# Altium PCB fff.PcbDoc
Units mm, origin at the board's own origin, x right, y up, seen from the top; angles counter-clockwise.
Board outline 150 x 100 mm, 2 copper layers (Top Layer, Bottom Layer); 180 components, 16 nets, 505 pads, 526 vias.
Unrouted connection lines stored in the file: 15.
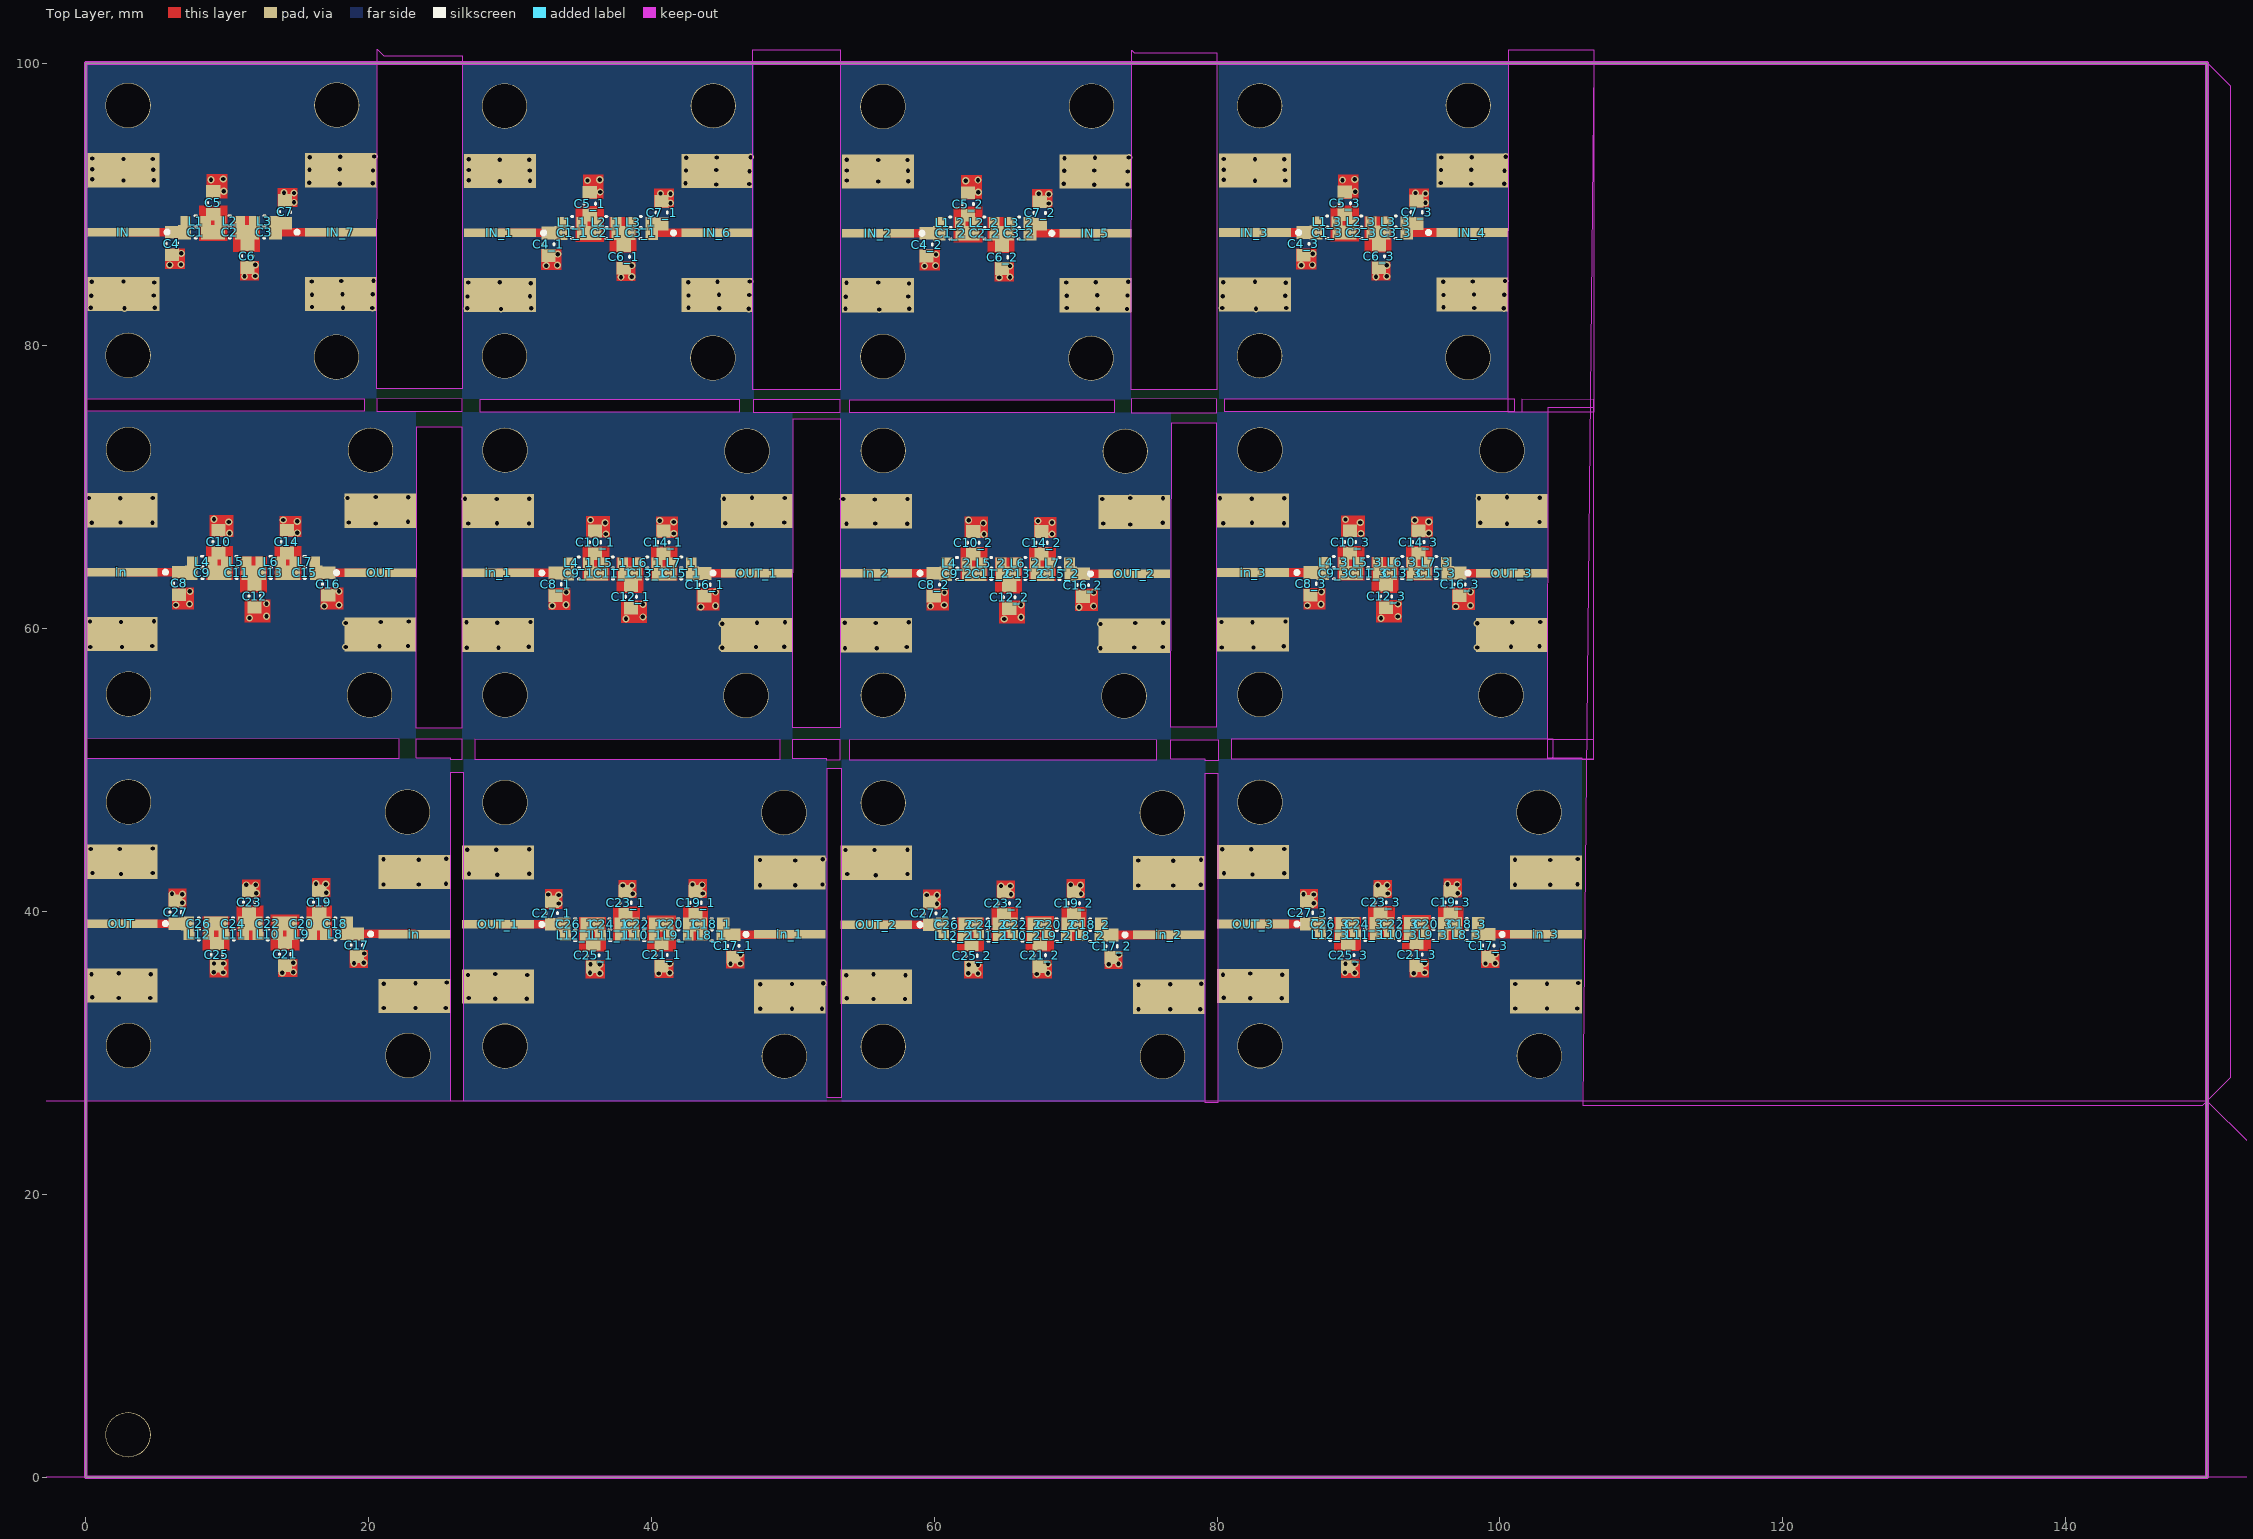
[diagram p0: Top Layer view]
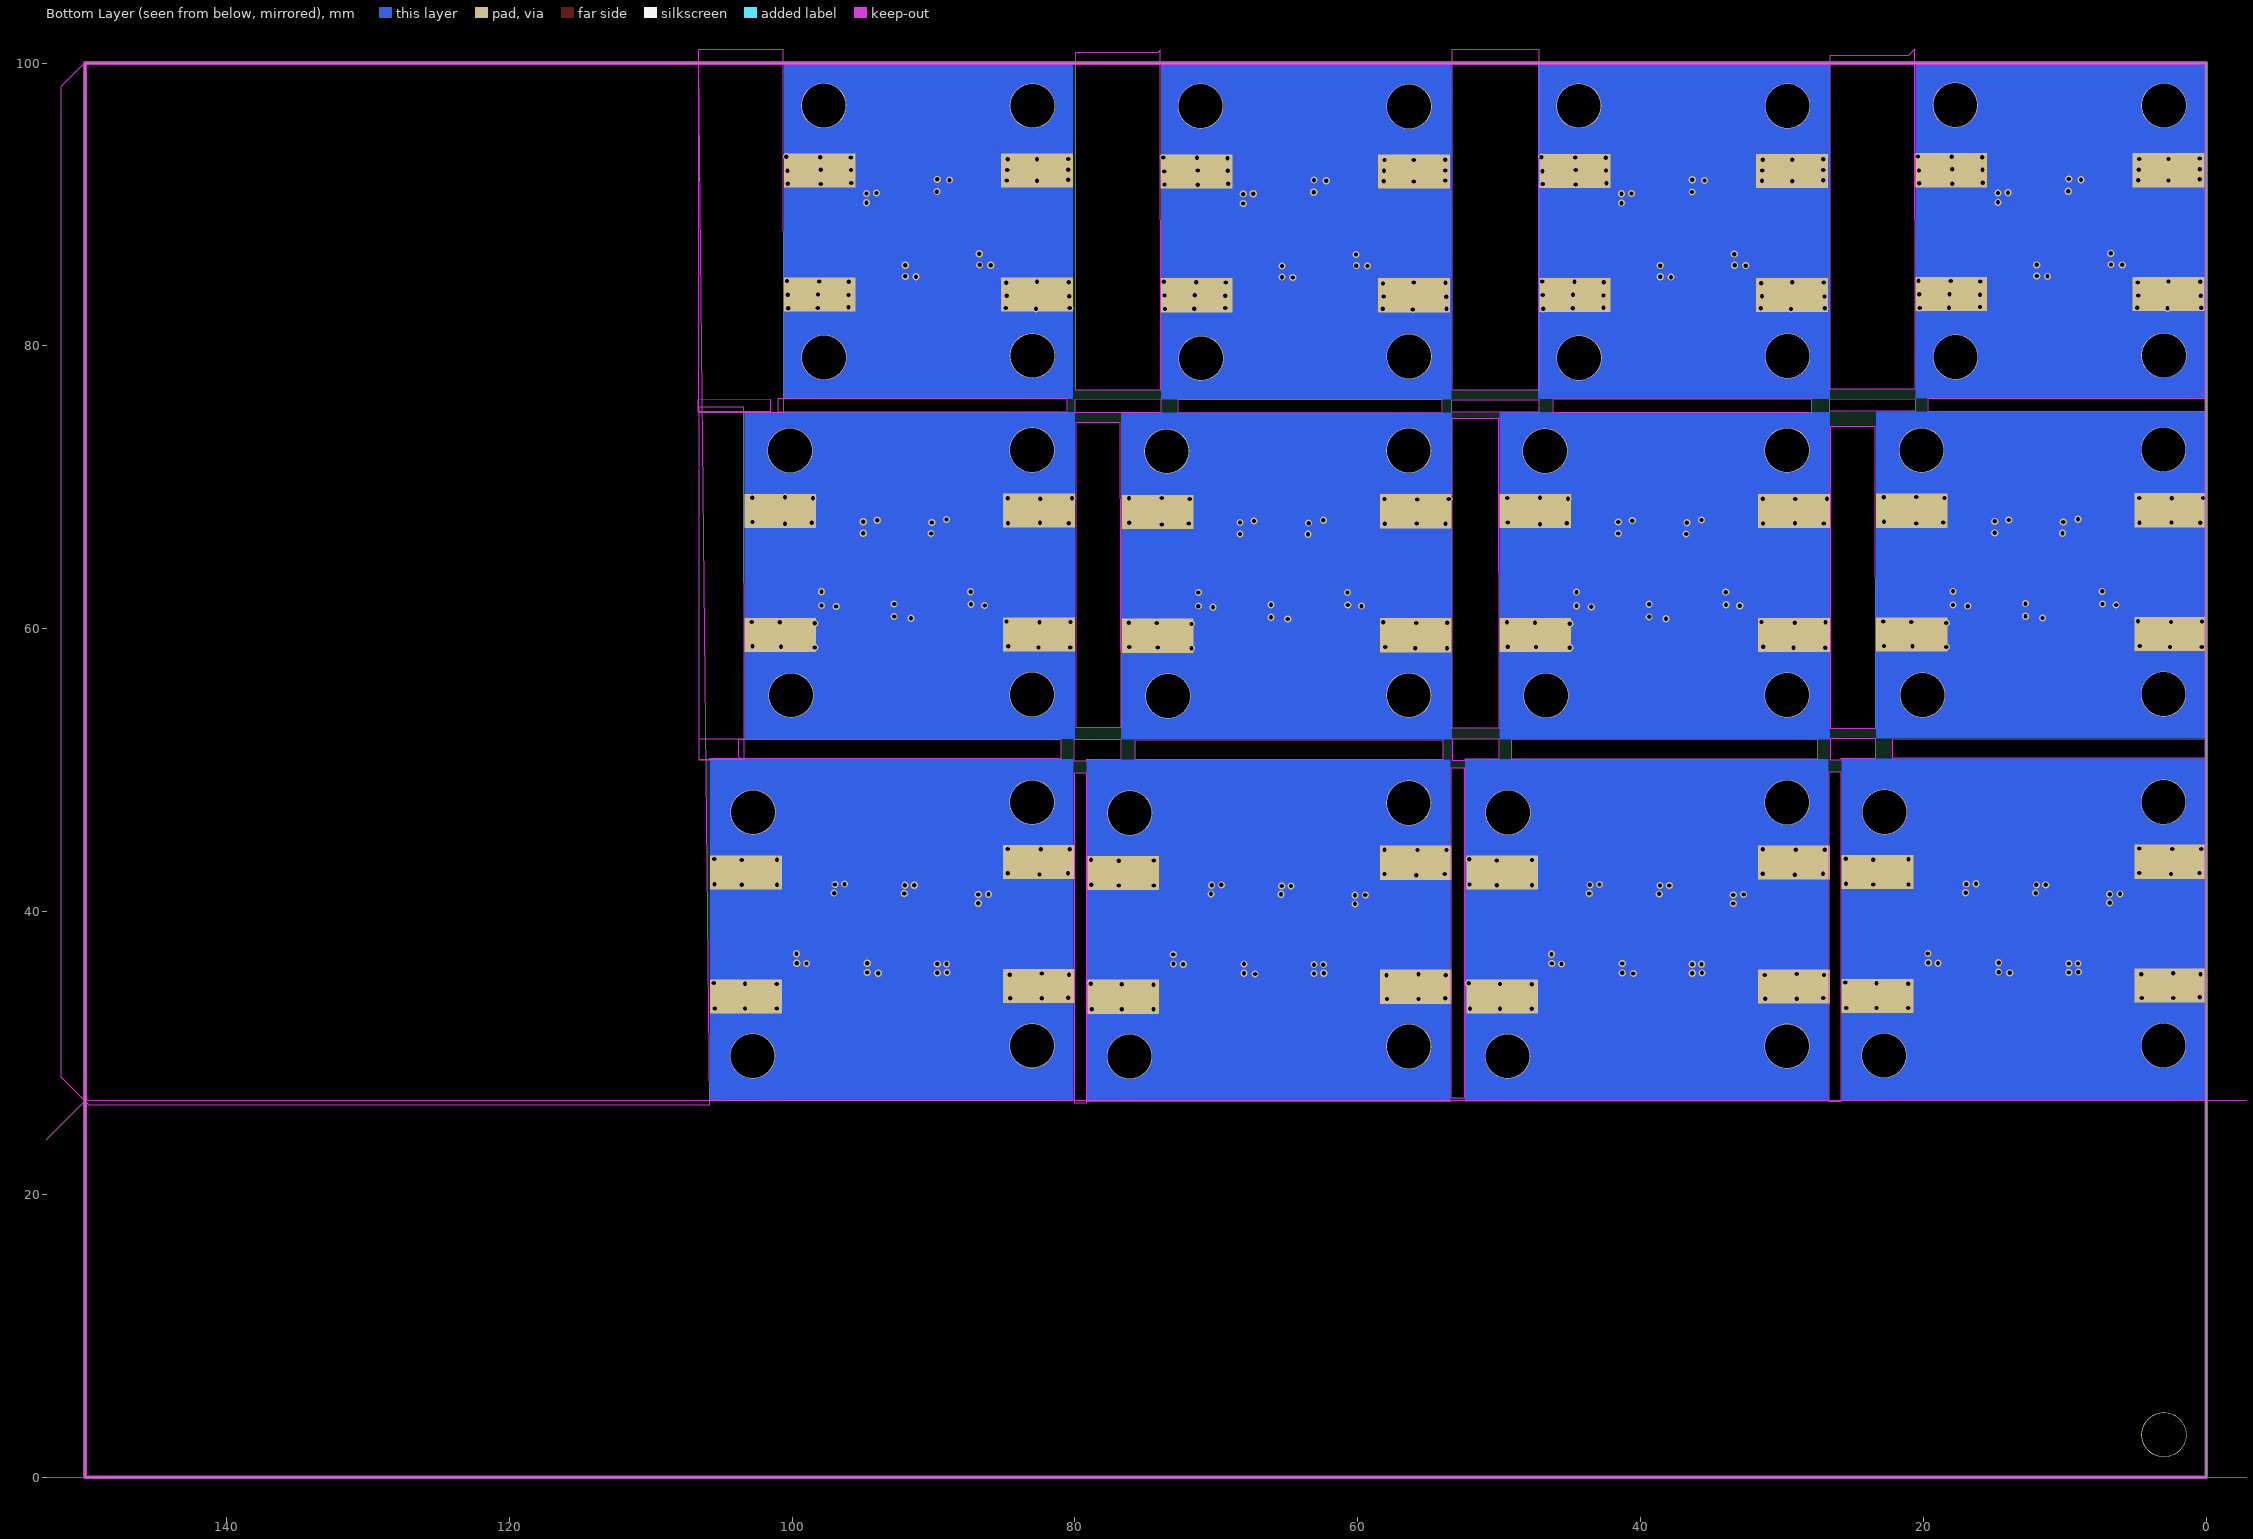
[diagram p1: Bottom Layer view, seen from below]

## Layer stack, top to bottom
Top Solder: solder mask 0.0102, Solder Resist, Dk 3.5
Top Layer: signal copper 0.0356
Dielectric 1: dielectric 0.32, FR-4, Dk 4.8
Bottom Layer: signal copper 0.0356
Bottom Solder: solder mask 0.0102, Solder Resist, Dk 3.5

## Board outline
0,0 150,0 150,100 0,100
cut-out: 105.842,26.314 149.708,26.314 151.663,28.27 151.663,98.374 149.987,100.051 106.731,100.051 106.629,99.949
cut-out: -3.34,26.619 149.987,26.619 153.01,23.597 153.01,0 -3.416,0
cut-out: 79.159,49.784 80.048,49.784 80.048,26.492 79.159,26.492
cut-out: 52.451,50.114 53.442,50.114 53.442,26.822 52.451,26.822
cut-out: 100.61,100.939 106.629,100.939 106.629,75.311 100.582,75.311
cut-out: 80.543,76.251 101.016,76.251 101.016,75.336 80.543,75.336
cut-out: 101.549,76.225 101.549,75.336 106.629,75.336 106.629,76.2
cut-out: 103.431,75.667 106.604,75.667 106.604,50.775 103.374,50.775
cut-out: 81.001,52.196 81.001,50.8 103.632,50.8 103.759,50.927 103.759,52.171
cut-out: 103.378,52.197 106.604,52.197 106.604,50.724 105.816,50.724 105.816,50.825 103.403,50.825 103.378,50.851
cut-out: 73.953,100.9 74.143,100.711 79.985,100.711 79.985,76.886 73.927,76.886
cut-out: 54.026,76.2 72.746,76.2 72.746,75.286 54.026,75.286
cut-out: 73.914,76.267 73.914,75.286 79.985,75.286 79.985,76.236
cut-out: 76.784,74.549 79.959,74.549 79.959,53.035 76.735,53.035
cut-out: 53.975,52.146 53.975,50.749 75.743,50.749 75.743,52.121
cut-out: 76.733,52.146 80.086,52.146 80.086,50.673 79.172,50.673 79.172,50.775 76.759,50.775 76.733,50.8
cut-out: 47.181,100.951 53.34,100.951 53.34,76.911 47.155,76.911
cut-out: 27.915,76.225 46.228,76.225 46.228,75.311 27.915,75.311
cut-out: 47.219,76.205 47.219,75.311 53.34,75.311 53.34,76.174
cut-out: 50.038,74.854 53.34,74.854 53.34,52.984 49.989,52.984
cut-out: 27.508,52.171 27.508,50.775 49.124,50.775 49.124,52.147
cut-out: 49.987,52.172 53.315,52.172 53.315,50.698 52.4,50.698 52.4,50.8 49.987,50.8
cut-out: 25.806,49.86 26.695,49.86 26.695,26.568 25.806,26.568
cut-out: 23.368,52.222 26.594,52.222 26.594,50.749 25.806,50.749 25.806,50.851 23.393,50.851 23.368,50.876
cut-out: 0,52.222 0,50.825 22.174,50.825 22.174,52.198
cut-out: 23.417,74.27 26.594,74.27 26.594,52.959 23.369,52.959
cut-out: 20.574,76.256 20.574,75.362 26.619,75.362 26.619,76.225
cut-out: 0,76.276 19.71,76.276 19.71,75.362 0,75.362
cut-out: 20.6,100.965 21.057,100.508 26.619,100.508 26.619,76.962 20.573,76.962

## Design rules (kind name [scope] priority, off if disabled: settings)
Clearance [All] p1: gap=0.254 ignorepadtopadclearanceinfootprint=FALSE except(0: Arc-Hole Track-Hole SMDPad-Hole THPad-Hole Via-Hole Fill-Hole Poly-Hole Region-Hole Text-Hole)
PolygonConnect [All] p1: connectstyle=Relief reliefconductorwidth=0.254 reliefentries=4 polygonreliefangle="90 Angle" airgapwidth=0.254
RoutingVias [All] p1: holewidth=0.711 width=1.27 viastyle="Through Hole" minholewidth=0.711 minwidth=1.27 maxholewidth=0.711 maxwidth=1.27
SolderMaskExpansion [All] p1: expansion=0.102
Width [All] p1: maxlimit=0.762 minlimit=0.61 preferedwidth=0.61
30 further rules are at their usual default settings.

## Classes and differential pairs
component class fff: C1 C2 C3 C4 C5 C6 C7 C8 C9 C10 C11 C12 C13 C14 C15 C16 C17 C18 C19 C20 C21 C22 C23 C24 C25 C26 C27 IN in L1 L2 L3 L4 L5 L6 L7 L8 L9 L10 L11 L12 OUT

## Components (designator, comment, footprint, x,y, rotation, side; value= is the part's Value field where it differs from the comment)
C1 "10uF" 0603C 7.785,88.036 r0 top
C1_1 "10uF" 0603C 34.404,87.986 r0 top (schematic designator C1)
C1_2 "10uF" 0603C 61.15,87.96 r0 top (schematic designator C1)
C1_3 "10uF" 0603C 87.795,88.011 r0 top (schematic designator C1)
C2 "10uF" 0603C 10.198,88.036 r0 top
C2_1 "10uF" 0603C 36.817,87.986 r0 top (schematic designator C2)
C2_2 "10uF" 0603C 63.563,87.96 r0 top (schematic designator C2)
C2_3 "10uF" 0603C 90.208,88.011 r0 top (schematic designator C2)
C3 "10uF" 0603C 12.611,88.036 r0 top
C3_1 "10uF" 0603C 39.23,87.986 r0 top (schematic designator C3)
C3_2 "10uF" 0603C 65.976,87.96 r0 top (schematic designator C3)
C3_3 "10uF" 0603C 92.621,88.011 r0 top (schematic designator C3)
C4 "10uF" 0603C 6.096,87.236 r90 top
C4_1 "10uF" 0603C 32.715,87.186 r90 top (schematic designator C4)
C4_2 "10uF" 0603C 59.461,87.16 r90 top (schematic designator C4)
C4_3 "10uF" 0603C 86.106,87.211 r90 top (schematic designator C4)
C5 "10uF" 0603C 9.017,90.106 r270 top
C5_1 "10uF" 0603C 35.636,90.056 r270 top (schematic designator C5)
C5_2 "10uF" 0603C 62.382,90.03 r270 top (schematic designator C5)
C5_3 "10uF" 0603C 89.027,90.081 r270 top (schematic designator C5)
C6 "10uF" 0603C 11.43,86.347 r90 top
C6_1 "10uF" 0603C 38.049,86.297 r90 top (schematic designator C6)
C6_2 "10uF" 0603C 64.795,86.271 r90 top (schematic designator C6)
C6_3 "10uF" 0603C 91.44,86.322 r90 top (schematic designator C6)
C7 "10uF" 0603C 14.097,89.471 r270 top
C7_1 "10uF" 0603C 40.716,89.421 r270 top (schematic designator C7)
C7_2 "10uF" 0603C 67.462,89.395 r270 top (schematic designator C7)
C7_3 "10uF" 0603C 94.107,89.446 r270 top (schematic designator C7)
C8 "10uf" 0603C 6.604,63.195 r90 top
C8_1 "10uf" 0603C 33.223,63.144 r90 top (schematic designator C8)
C8_2 "10uf" 0603C 59.969,63.119 r90 top (schematic designator C8)
C8_3 "10uf" 0603C 86.614,63.17 r90 top (schematic designator C8)
C9 "10uf" 0603C 8.255,63.957 r180 top
C9_1 "10uf" 0603C 34.874,63.906 r180 top (schematic designator C9)
C9_2 "10uf" 0603C 61.62,63.881 r180 top (schematic designator C9)
C9_3 "10uf" 0603C 88.265,63.932 r180 top (schematic designator C9)
C10 "10uf" 0603C 9.398,66.154 r90 top
C10_1 "10uf" 0603C 36.017,66.103 r90 top (schematic designator C10)
C10_2 "10uf" 0603C 62.763,66.078 r90 top (schematic designator C10)
C10_3 "10uf" 0603C 89.408,66.129 r90 top (schematic designator C10)
C11 "10uf" 0603C 10.668,63.957 r0 top
C11_1 "10uf" 0603C 37.287,63.906 r0 top (schematic designator C11)
C11_2 "10uf" 0603C 64.033,63.881 r0 top (schematic designator C11)
C11_3 "10uf" 0603C 90.678,63.932 r0 top (schematic designator C11)
C12 "10uf" 0603C 11.938,62.306 r90 top
C12_1 "10uf" 0603C 38.557,62.255 r90 top (schematic designator C12)
C12_2 "10uf" 0603C 65.303,62.23 r90 top (schematic designator C12)
C12_3 "10uf" 0603C 91.948,62.281 r90 top (schematic designator C12)
C13 "10uf" 0603C 13.081,63.957 r180 top
C13_1 "10uf" 0603C 39.7,63.906 r180 top (schematic designator C13)
C13_2 "10uf" 0603C 66.446,63.881 r180 top (schematic designator C13)
C13_3 "10uf" 0603C 93.091,63.932 r180 top (schematic designator C13)
C14 "10uf" 0603C 14.224,66.154 r90 top
C14_1 "10uf" 0603C 40.843,66.103 r90 top (schematic designator C14)
C14_2 "10uf" 0603C 67.589,66.078 r90 top (schematic designator C14)
C14_3 "10uf" 0603C 94.234,66.129 r90 top (schematic designator C14)
C15 "10uf" 0603C 15.494,63.957 r0 top
C15_1 "10uf" 0603C 42.113,63.906 r0 top (schematic designator C15)
C15_2 "10uf" 0603C 68.859,63.881 r0 top (schematic designator C15)
C15_3 "10uf" 0603C 95.504,63.932 r0 top (schematic designator C15)
C16 "10uf" 0603C 17.145,63.157 r90 top
C16_1 "10uf" 0603C 43.764,63.106 r90 top (schematic designator C16)
C16_2 "10uf" 0603C 70.51,63.081 r90 top (schematic designator C16)
C16_3 "10uf" 0603C 97.155,63.132 r90 top (schematic designator C16)
C17 "10uf" 0603C 19.177,37.617 r90 top
C17_1 "10uf" 0603C 45.796,37.567 r90 top (schematic designator C17)
C17_2 "10uf" 0603C 72.542,37.541 r90 top (schematic designator C17)
C17_3 "10uf" 0603C 99.187,37.592 r90 top (schematic designator C17)
C18 "10uf" 0603C 17.653,39.141 r0 top
C18_1 "10uf" 0603C 44.272,39.091 r0 top (schematic designator C18)
C18_2 "10uf" 0603C 71.018,39.065 r0 top (schematic designator C18)
C18_3 "10uf" 0603C 97.663,39.116 r0 top (schematic designator C18)
C19 "10uf" 0603C 16.51,40.665 r90 top
C19_1 "10uf" 0603C 43.129,40.615 r90 top (schematic designator C19)
C19_2 "10uf" 0603C 69.875,40.589 r90 top (schematic designator C19)
C19_3 "10uf" 0603C 96.52,40.64 r90 top (schematic designator C19)
C20 "10uf" 0603C 15.278,39.141 r180 top
C20_1 "10uf" 0603C 41.897,39.091 r180 top (schematic designator C20)
C20_2 "10uf" 0603C 68.643,39.065 r180 top (schematic designator C20)
C20_3 "10uf" 0603C 95.288,39.116 r180 top (schematic designator C20)
C21 "10uf" 0603C 14.097,36.982 r90 top
C21_1 "10uf" 0603C 40.716,36.932 r90 top (schematic designator C21)
C21_2 "10uf" 0603C 67.462,36.906 r90 top (schematic designator C21)
C21_3 "10uf" 0603C 94.107,36.957 r90 top (schematic designator C21)
C22 "10uf" 0603C 12.865,39.141 r0 top
C22_1 "10uf" 0603C 39.484,39.091 r0 top (schematic designator C22)
C22_2 "10uf" 0603C 66.23,39.065 r0 top (schematic designator C22)
C22_3 "10uf" 0603C 92.875,39.116 r0 top (schematic designator C22)
C23 "10uf" 0603C 11.557,40.665 r90 top
C23_1 "10uf" 0603C 38.176,40.615 r90 top (schematic designator C23)
C23_2 "10uf" 0603C 64.922,40.589 r90 top (schematic designator C23)
C23_3 "10uf" 0603C 91.567,40.64 r90 top (schematic designator C23)
C24 "10uf" 0603C 10.414,39.141 r180 top
C24_1 "10uf" 0603C 37.033,39.091 r180 top (schematic designator C24)
C24_2 "10uf" 0603C 63.779,39.065 r180 top (schematic designator C24)
C24_3 "10uf" 0603C 90.424,39.116 r180 top (schematic designator C24)
C25 "10uf" 0603C 9.271,36.944 r90 top
C25_1 "10uf" 0603C 35.89,36.894 r90 top (schematic designator C25)
C25_2 "10uf" 0603C 62.636,36.868 r90 top (schematic designator C25)
C25_3 "10uf" 0603C 89.281,36.919 r90 top (schematic designator C25)
C26 "10uf" 0603C 8.001,39.141 r0 top
C26_1 "10uf" 0603C 34.62,39.091 r0 top (schematic designator C26)
C26_2 "10uf" 0603C 61.366,39.065 r0 top (schematic designator C26)
C26_3 "10uf" 0603C 88.011,39.116 r0 top (schematic designator C26)
C27 "10uf" 0603C 6.35,39.941 r90 top
C27_1 "10uf" 0603C 32.969,39.891 r90 top (schematic designator C27)
C27_2 "10uf" 0603C 59.715,39.865 r90 top (schematic designator C27)
C27_3 "10uf" 0603C 86.36,39.916 r90 top (schematic designator C27)
IN "SMA" SMA#1 5.105,87.909 r0 top
in "SMA" SMA#1 4.978,63.868 r0 top
in "SMA" SMA#1 20.803,38.532 r180 top
in_1 "SMA" SMA#1 47.346,38.506 r180 top (schematic designator in)
in_1 "SMA" SMA#1 31.598,63.817 r0 top (schematic designator in)
IN_1 "SMA" SMA#1 31.725,87.859 r0 top (schematic designator IN)
in_2 "SMA" SMA#1 74.143,38.481 r180 top (schematic designator in)
in_2 "SMA" SMA#1 58.344,63.792 r0 top (schematic designator in)
IN_2 "SMA" SMA#1 58.471,87.833 r0 top (schematic designator IN)
in_3 "SMA" SMA#1 100.813,38.506 r180 top (schematic designator in)
in_3 "SMA" SMA#1 84.988,63.843 r0 top (schematic designator in)
IN_3 "SMA" SMA#1 85.115,87.884 r0 top (schematic designator IN)
IN_4 "SMA" SMA#2 95.606,88.138 r180 top (schematic designator IN)
IN_5 "SMA" SMA#2 68.961,88.087 r180 top (schematic designator IN)
IN_6 "SMA" SMA#2 42.215,88.113 r180 top (schematic designator IN)
IN_7 "SMA" SMA#2 15.596,88.163 r180 top (schematic designator IN)
L1 "Sele" 0603L 7.772,88.798 r180 top value=100uH
L1_1 "Sele" 0603L 34.391,88.748 r180 top value=100uH (schematic designator L1)
L1_2 "Sele" 0603L 61.138,88.722 r180 top value=100uH (schematic designator L1)
L1_3 "Sele" 0603L 87.782,88.773 r180 top value=100uH (schematic designator L1)
L2 "Sele" 0603L 10.185,88.798 r180 top value=100uH
L2_1 "Sele" 0603L 36.804,88.748 r180 top value=100uH (schematic designator L2)
L2_2 "Sele" 0603L 63.551,88.722 r180 top value=100uH (schematic designator L2)
L2_3 "Sele" 0603L 90.195,88.773 r180 top value=100uH (schematic designator L2)
L3 "Sele" 0603L 12.636,88.798 r180 top value=100uH
L3_1 "Sele" 0603L 39.256,88.748 r180 top value=100uH (schematic designator L3)
L3_2 "Sele" 0603L 66.002,88.722 r180 top value=100uH (schematic designator L3)
L3_3 "Sele" 0603L 92.646,88.773 r180 top value=100uH (schematic designator L3)
L4 "Sele" 0603L 8.242,64.719 r180 top value=100uH
L4_1 "Sele" 0603L 34.861,64.668 r180 top value=100uH (schematic designator L4)
L4_2 "Sele" 0603L 61.608,64.643 r180 top value=100uH (schematic designator L4)
L4_3 "Sele" 0603L 88.252,64.694 r180 top value=100uH (schematic designator L4)
L5 "Sele" 0603L 10.655,64.719 r180 top value=100uH
L5_1 "Sele" 0603L 37.274,64.668 r180 top value=100uH (schematic designator L5)
L5_2 "Sele" 0603L 64.021,64.643 r180 top value=100uH (schematic designator L5)
L5_3 "Sele" 0603L 90.665,64.694 r180 top value=100uH (schematic designator L5)
L6 "Sele" 0603L 13.081,64.719 r180 top value=100uH
L6_1 "Sele" 0603L 39.7,64.668 r180 top value=100uH (schematic designator L6)
L6_2 "Sele" 0603L 66.446,64.643 r180 top value=100uH (schematic designator L6)
L6_3 "Sele" 0603L 93.091,64.694 r180 top value=100uH (schematic designator L6)
L7 "Sele" 0603L 15.494,64.719 r180 top value=100uH
L7_1 "Sele" 0603L 42.113,64.668 r180 top value=100uH (schematic designator L7)
L7_2 "Sele" 0603L 68.859,64.643 r180 top value=100uH (schematic designator L7)
L7_3 "Sele" 0603L 95.504,64.694 r180 top value=100uH (schematic designator L7)
L8 "Sele" 0603L 17.653,38.379 r0 top value=100uH
L8_1 "Sele" 0603L 44.272,38.329 r0 top value=100uH (schematic designator L8)
L8_2 "Sele" 0603L 71.018,38.303 r0 top value=100uH (schematic designator L8)
L8_3 "Sele" 0603L 97.663,38.354 r0 top value=100uH (schematic designator L8)
L9 "Sele" 0603L 15.291,38.379 r0 top value=100uH
L9_1 "Sele" 0603L 41.91,38.329 r0 top value=100uH (schematic designator L9)
L9_2 "Sele" 0603L 68.656,38.303 r0 top value=100uH (schematic designator L9)
L9_3 "Sele" 0603L 95.301,38.354 r0 top value=100uH (schematic designator L9)
L10 "Sele" 0603L 12.878,38.379 r0 top value=100uH
L10_1 "Sele" 0603L 39.497,38.329 r0 top value=100uH (schematic designator L10)
L10_2 "Sele" 0603L 66.243,38.303 r0 top value=100uH (schematic designator L10)
L10_3 "Sele" 0603L 92.888,38.354 r0 top value=100uH (schematic designator L10)
L11 "Sele" 0603L 10.477,38.379 r0 top value=100uH
L11_1 "Sele" 0603L 37.097,38.329 r0 top value=100uH (schematic designator L11)
L11_2 "Sele" 0603L 63.843,38.303 r0 top value=100uH (schematic designator L11)
L11_3 "Sele" 0603L 90.487,38.354 r0 top value=100uH (schematic designator L11)
L12 "Sele" 0603L 8.001,38.379 r0 top value=100uH
L12_1 "Sele" 0603L 34.62,38.329 r0 top value=100uH (schematic designator L12)
L12_2 "Sele" 0603L 61.366,38.303 r0 top value=100uH (schematic designator L12)
L12_3 "Sele" 0603L 88.011,38.354 r0 top value=100uH (schematic designator L12)
OUT "SMA" SMA#1 18.39,64.084 r180 top
OUT "SMA" SMA#1 4.978,39.014 r0 top
OUT_1 "SMA" SMA#1 31.598,38.964 r0 top (schematic designator OUT)
OUT_1 "SMA" SMA#1 45.009,64.059 r180 top (schematic designator OUT)
OUT_2 "SMA" SMA#1 58.344,38.938 r0 top (schematic designator OUT)
OUT_2 "SMA" SMA#1 71.704,64.008 r180 top (schematic designator OUT)
OUT_3 "SMA" SMA#1 84.988,38.989 r0 top (schematic designator OUT)
OUT_3 "SMA" SMA#1 98.4,64.059 r180 top (schematic designator OUT)

## Footprints (in the part's own frame and the unit in brackets; to place one, negate y for a bottom-side part, rotate by r counter-clockwise, add the part's x,y. Pads: shape width x height; smd on the part's side, far side on the other; paste and mask are expansions set on the pad)
0603C [mm] "Chip Capacitor, Body 1.6x0.8mm, Height 1.0mm, IPC Medium Density"
  rect 0.9x1 smd: 1(-0.8,0) 2(0.8,0)
  silkscreen extent -0.05,-0.4 0.05,0.4, body extent -0.87,-0.48 0.88,0.47, height 1
0603L [mil] "Bead 0603L"
  rect 30x30 smd: 1(27.5,0) 2(-27.5,0)
  silkscreen extent -2,-16 2,16, body extent -34,-19 34,19, height 24
SMA#1 [mil]
  rect 200x24 smd: 1(-96,5)
  rect 200x95 smd: 2(-96,-167.5) 2(-96,177.5)
  rect 200x95 smd far side: 2(-96,-167.5) 2(-96,177.5) 2(-96,177.5)
  silkscreen extent 21,0 31,10, body extent -571,-183 -9,192, height 171
SMA#2 [mil]
  rect 200x95 smd: 2(-96,177.5) 2(-96,-167.5)
  rect 200x95 smd far side: 2(-96,177.5) 2(-96,177.5) 2(-96,-167.5)
  rect 200x24 smd: 2(-96,5)
  silkscreen extent 21,0 31,10, body extent -571,-183 -9,192, height 171

## Part data
C1 C1_1 C1_2 C1_3 C2 C2_1 C2_2 C2_3 C3 C3_1 C3_2 C3_3 C4 C4_1 C4_2 C4_3 C5 C5_1 C5_2 C5_3 C6 C6_1 C6_2 C6_3 C7 C7_1 C7_2 C7_3 C8 C8_1 C8_2 C8_3 C9 C9_1 C9_2 C9_3 C10 C10_1 C10_2 C10_3 C11 C11_1 C11_2 C11_3 C12 C12_1 C12_2 C12_3 C13 C13_1 C13_2 C13_3 C14 C14_1 C14_2 C14_3 C15 C15_1 C15_2 C15_3 C16 C16_1 C16_2 C16_3 C17 C17_1 C17_2 C17_3 C18 C18_1 C18_2 C18_3 C19 C19_1 C19_2 C19_3 C20 C20_1 C20_2 C20_3 C21 C21_1 C21_2 C21_3 C22 C22_1 C22_2 C22_3 C23 C23_1 C23_2 C23_3 C24 C24_1 C24_2 C24_3 C25 C25_1 C25_2 C25_3 C26 C26_1 C26_2 C26_3 C27 C27_1 C27_2 C27_3: library part C, "Capacitor"
IN in in in_1 in_1 IN_1 in_2 in_2 IN_2 in_3 in_3 IN_3 IN_4 IN_5 IN_6 IN_7 OUT OUT OUT_1 OUT_1 OUT_2 OUT_2 OUT_3 OUT_3: "SMA Connector"
L1 L1_1 L1_2 L1_3 L2 L2_1 L2_2 L2_3 L3 L3_1 L3_2 L3_3 L4 L4_1 L4_2 L4_3 L5 L5_1 L5_2 L5_3 L6 L6_1 L6_2 L6_3 L7 L7_1 L7_2 L7_3 L8 L8_1 L8_2 L8_3 L9 L9_1 L9_2 L9_3 L10 L10_1 L10_2 L10_3 L11 L11_1 L11_2 L11_3 L12 L12_1 L12_2 L12_3: library part Inductor, "Inductor", Published=8-Jun-2000, Publisher="Altium Limited", Revision="July-2002: Re-released for DXP Platform."

## Free pads (board coordinates)
  round 3.2 hole 3.1: 2(3,3) 2(3,79.327) 2(3,97) 2(3.025,30.528) 2(3.025,47.755) 2(3.025,55.369) 2(3.025,72.672) 2(17.726,79.2) 2(17.752,97.025) 2(20.063,55.318) 2(20.139,72.621) 2(22.756,47.044) 2(22.781,29.817) 2(29.619,79.276) 2(29.619,96.949) 2(29.645,30.477) 2(29.645,47.704) 2(29.645,55.318) 2(29.645,72.621) 2(44.346,79.149) 2(44.371,96.974) 2(46.682,55.268) 2(46.759,72.571) 2(49.375,46.993) 2(49.4,29.766) 2(56.365,79.251) 2(56.365,96.924) 2(56.391,30.452) 2(56.391,47.679) 2(56.391,55.293) 2(56.391,72.596) 2(71.092,79.124) 2(71.117,96.949) 2(73.429,55.242) 2(73.505,72.545) 2(76.121,46.967) 2(76.146,29.741) 2(83.01,79.302) 2(83.01,96.974) 2(83.035,30.503) 2(83.035,47.729) 2(83.035,55.344) 2(83.035,72.647) 2(97.736,79.175) 2(97.762,97) 2(100.073,55.293) 2(100.149,72.596) 2(102.766,47.018) 2(102.791,29.791)

## Via types
v1: diameter 0.508, hole 0.305, Top Layer to Bottom Layer, tented both sides, 526 vias

## Nets (pads, with @x,y where several pads share a name; then routed paths per layer and width w, separated by ;. In a path a pad name is that pad's centre, name@x,y a point inside that pad or via, vN(x,y) a via of type N, cw(c..) or ccw(c..) an arc to the next point about the centre after c; other vN are vias at no path point)
GND: C4.1 C4_1.1 C5.1 C5_1.1 C6.1 C6_1.1 C7.1 C7_1.1 C8.1 C8_1.1 C10.2 C10_1.2 C12.1 C12_1.1 C14.2 C14_1.2 C16.1 C16_1.1 C17.1 C17_1.1 C19.2 C19_1.2 C21.1 C21_1.1 C23.2 C23_1.2 C25.1 C25_1.1 C27.2 C27_1.2 in.2 IN.2 in_1.2 IN_1.2 IN_6.2@44.653,83.604 IN_6.2@44.653,92.367 IN_7.2@18.034,83.655 IN_7.2@18.034,92.418 OUT.2 OUT_1.2
  other v1: 47.701,33.122 49.936,33.122 52.07,33.122 21.082,33.172 23.317,33.172 25.451,33.172 28.956,33.833 31.191,33.833 2.337,33.884 4.572,33.884 27.076,33.884 27.076,33.884 0.457,33.934 47.701,34.849 49.936,34.874 21.082,34.9 23.317,34.925 52.146,34.925 25.527,34.976 27.026,35.509 27.026,35.509 31.217,35.509 0.406,35.56 4.597,35.56 28.956,35.585 40.513,35.611 2.337,35.636 36.347,35.636 13.894,35.662 35.662,35.662 41.3,35.662 9.728,35.687 9.042,35.712 14.681,35.712 35.687,36.271 36.347,36.271 45.593,36.297 9.068,36.322 9.728,36.322 41.3,36.322 46.279,36.322 18.974,36.347 14.681,36.373 19.66,36.373 46.304,36.982 19.685,37.033 33.452,40.564 6.833,40.615 33.452,41.173 32.715,41.199 6.833,41.224 6.096,41.25 38.684,41.25 43.637,41.275 12.065,41.3 17.018,41.326 37.973,41.834 38.633,41.834 47.676,41.859 50.165,41.859 11.354,41.885 12.014,41.885 43.586,41.885 21.057,41.91 23.546,41.91 42.901,41.91 52.095,41.91 16.967,41.935 16.281,41.961 25.476,41.961 29.108,42.596 2.489,42.647 27.102,42.672 27.102,42.672 31.369,42.672 0.483,42.723 4.75,42.723 50.165,43.612 47.676,43.637 23.546,43.663 21.057,43.688 52.121,43.688 25.502,43.739 26.975,44.374 26.975,44.374 29.032,44.374 31.369,44.399 0.356,44.425 2.413,44.425 4.75,44.45 26.949,58.649 26.949,58.649 29.185,58.649 45.009,58.649 0.33,58.699 2.565,58.699 18.39,58.699 47.396,58.699 31.318,58.725 49.403,58.725 20.777,58.75 4.699,58.776 22.784,58.776 45.009,60.35 18.39,60.401 29.108,60.427 47.473,60.427 26.924,60.452 26.924,60.452 49.454,60.452 2.489,60.477 20.853,60.477 31.445,60.477 0.305,60.503 22.835,60.503 4.826,60.528 38.202,60.706 11.582,60.757 39.395,60.833 12.776,60.884 43.485,61.544 16.866,61.595 32.995,61.62 44.526,61.62 6.375,61.671 17.907,61.671 33.96,61.697 39.395,61.722 7.341,61.747 12.776,61.773 33.985,62.586 44.526,62.586 7.366,62.636 17.907,62.636 36.779,66.7 41.58,66.726 10.16,66.751 14.961,66.777 47.117,67.386 20.498,67.437 27.051,67.437 27.051,67.437 31.344,67.437 29.083,67.462 45.212,67.462 0.432,67.488 4.724,67.488 36.728,67.488 2.464,67.513 18.593,67.513 49.403,67.513 10.109,67.539 41.58,67.539 22.784,67.564 14.961,67.589 40.589,67.64 13.97,67.691 35.687,67.691 9.068,67.742 29.058,69.164 26.822,69.19 26.822,69.19 31.369,69.19 45.136,69.19 2.438,69.215 0.203,69.24 4.75,69.24 18.517,69.24 49.428,69.24 47.117,69.266 22.809,69.291 20.498,69.317 29.362,82.601 46.888,82.626 2.743,82.652 26.975,82.652 26.975,82.652 31.496,82.652 44.806,82.652 20.269,82.677 0.356,82.702 4.877,82.702 18.186,82.702 42.621,82.702 16.002,82.753 27,83.49 27,83.49 31.42,83.515 0.381,83.541 4.801,83.566 42.621,83.566 46.914,83.591 16.002,83.617 44.78,83.604 20.295,83.642 18.161,83.655 31.471,84.43 4.851,84.48 27.051,84.48 27.051,84.48 29.286,84.506 42.596,84.506 0.432,84.531 44.679,84.531 2.667,84.557 15.977,84.557 46.965,84.557 18.059,84.582 20.345,84.607 37.846,84.861 38.608,84.887 11.227,84.912 11.989,84.938 32.563,85.674 38.608,85.674 33.35,85.7 5.944,85.725 11.989,85.725 6.731,85.75 33.376,86.487 6.756,86.538 41.351,90.094 14.732,90.145 41.351,90.754 40.64,90.78 14.732,90.805 14.021,90.83 36.373,90.881 9.754,90.932 44.577,91.415 46.914,91.44 17.958,91.465 20.295,91.491 42.418,91.491 15.799,91.542 29.286,91.643 31.42,91.669 2.667,91.694 35.484,91.694 4.801,91.719 27.076,91.719 27.076,91.719 8.865,91.745 36.347,91.745 0.457,91.77 9.728,91.796 46.939,92.354 20.32,92.405 31.394,92.405 42.443,92.405 27.076,92.431 27.076,92.431 44.577,92.431 4.775,92.456 15.824,92.456 0.457,92.481 17.958,92.481 29.286,93.167 31.369,93.167 27.076,93.193 27.076,93.193 2.667,93.218 4.75,93.218 0.457,93.243 42.469,93.294 44.628,93.32 15.85,93.345 47.015,93.345 18.009,93.37 20.396,93.396
NetC1_1: C1.1 C1_1.1 C4.2 C4_1.2 IN.1 IN_1.1 L1.1 L1_1.1 | length 6.9
  Top Layer w0.61: IN.1 C4.2 ; IN_1.1 C4_1.2
NetC1_2: C1.2 C1_1.2 C2.1 C2_1.1 C5.2 C5_1.2 L1.2 L1_1.2 L2.1 L2_1.1
NetC2_2: C2.2 C2_1.2 C3.1 C3_1.1 C6.2 C6_1.2 L2.2 L2_1.2 L3.1 L3_1.1
NetC3_2: C3.2 C3_1.2 C7.2 C7_1.2 IN_6.2@44.653,87.986 IN_7.2@18.034,88.036 L3.2 L3_1.2 | length 9.4
  Top Layer w0.61: C3.2 14.097,88.036 18.034,88.036 IN_7.2@18.161,88.036 ; C3_1.2 IN_6.2@44.653,87.986
NetC8_2: C8.2 C8_1.2 C9.2 C9_1.2 in.1@2.54,63.995 in_1.1@29.159,63.944 L4.1 L4_1.1 | length 8.1
  Top Layer w0.61: in.1@2.54,63.995 C8.2 ; in_1.1@29.159,63.944 C8_1.2
NetC9_1: C9.1 C9_1.1 C10.1 C10_1.1 C11.1 C11_1.1 L4.2 L4_1.2 L5.1 L5_1.1
NetC11_2: C11.2 C11_1.2 C12.2 C12_1.2 C13.2 C13_1.2 L5.2 L5_1.2 L6.1 L6_1.1
NetC13_1: C13.1 C13_1.1 C14.1 C14_1.1 C15.1 C15_1.1 L6.2 L6_1.2 L7.1 L7_1.1
NetC15_2: C15.2 C15_1.2 C16.2 C16_1.2 L7.2 L7_1.2 OUT.1@20.828,63.957 OUT_1.1@47.447,63.932 | length 6.9
  Top Layer w0.61: C16.2 OUT.1@20.574,63.957 ; C16_1.2 OUT_1.1@47.193,63.906
NetC17_2: C17.2 C17_1.2 C18.2 C18_1.2 in.1@23.241,38.405 in_1.1@49.784,38.379 L8.1 L8_1.1 | length 8.1
  Top Layer w0.61: C17.2 in.1@23.241,38.417 ; C17_1.2 in_1.1@49.86,38.367
NetC18_1: C18.1 C18_1.1 C19.1 C19_1.1 C20.1 C20_1.1 L8.2 L8_1.2 L9.1 L9_1.1
NetC20_2: C20.2 C20_1.2 C21.2 C21_1.2 C22.2 C22_1.2 L9.2 L9_1.2 L10.1 L10_1.1
NetC22_1: C22.1 C22_1.1 C23.1 C23_1.1 C24.1 C24_1.1 L10.2 L10_1.2 L11.1 L11_1.1
NetC24_2: C24.2 C24_1.2 C25.2 C25_1.2 C26.2 C26_1.2 L11.2 L11_1.2 L12.1 L12_1.1
NetC26_1: C26.1 C26_1.1 C27.1 C27_1.1 L12.2 L12_1.2 OUT.1@2.54,39.141 OUT_1.1@29.159,39.091 | length 7.6
  Top Layer w0.61: OUT.1@2.54,39.141 C27.1 ; OUT_1.1@29.159,39.091 C27_1.1
pads on no net: C1_2.1 C1_2.2 C1_3.1 C1_3.2 C2_2.1 C2_2.2 C2_3.1 C2_3.2 C3_2.1 C3_2.2 C3_3.1 C3_3.2 C4_2.1 C4_2.2 C4_3.1 C4_3.2 C5_2.1 C5_2.2 C5_3.1 C5_3.2 C6_2.1 C6_2.2 C6_3.1 C6_3.2 C7_2.1 C7_2.2 C7_3.1 C7_3.2 C8_2.1 C8_2.2 C8_3.1 C8_3.2 C9_2.1 C9_2.2 C9_3.1 C9_3.2 C10_2.1 C10_2.2 C10_3.1 C10_3.2 C11_2.1 C11_2.2 C11_3.1 C11_3.2 C12_2.1 C12_2.2 C12_3.1 C12_3.2 C13_2.1 C13_2.2 C13_3.1 C13_3.2 C14_2.1 C14_2.2 C14_3.1 C14_3.2 C15_2.1 C15_2.2 C15_3.1 C15_3.2 C16_2.1 C16_2.2 C16_3.1 C16_3.2 C17_2.1 C17_2.2 C17_3.1 C17_3.2 C18_2.1 C18_2.2 C18_3.1 C18_3.2 C19_2.1 C19_2.2 C19_3.1 C19_3.2 C20_2.1 C20_2.2 C20_3.1 C20_3.2 C21_2.1 C21_2.2 C21_3.1 C21_3.2 C22_2.1 C22_2.2 C22_3.1 C22_3.2 C23_2.1 C23_2.2 C23_3.1 C23_3.2 C24_2.1 C24_2.2 C24_3.1 C24_3.2 C25_2.1 C25_2.2 C25_3.1 C25_3.2 C26_2.1 C26_2.2 C26_3.1 C26_3.2 C27_2.1 C27_2.2 C27_3.1 C27_3.2 IN_2.1 in_2.1 IN_2.2 in_2.2 in_3.1 IN_3.1 IN_3.2 in_3.2 IN_4.2 IN_5.2 L1_2.1 L1_2.2 L1_3.1 L1_3.2 L2_2.1 L2_2.2 L2_3.1 L2_3.2 L3_2.1 L3_2.2 L3_3.1 L3_3.2 L4_2.1 L4_2.2 L4_3.1 L4_3.2 L5_2.1 L5_2.2 L5_3.1 L5_3.2 L6_2.1 L6_2.2 L6_3.1 L6_3.2 L7_2.1 L7_2.2 L7_3.1 L7_3.2 L8_2.1 L8_2.2 L8_3.1 L8_3.2 L9_2.1 L9_2.2 L9_3.1 L9_3.2 L10_2.1 L10_2.2 L10_3.1 L10_3.2 L11_2.1 L11_2.2 L11_3.1 L11_3.2 L12_2.1 L12_2.2 L12_3.1 L12_3.2 OUT_2.1 OUT_2.2 OUT_3.1 OUT_3.2
copper on no net: | length 46.8
  Top Layer w0.61: 55.905,39.065 59.715,39.065 ; 55.905,63.919 59.969,63.919 ; 56.032,87.96 59.461,87.96 ; 66.776,87.96 71.399,87.96 ; 70.51,63.881 73.939,63.881 ; 72.542,38.341 76.606,38.341 ; 82.55,39.116 86.36,39.116 ; 82.55,63.97 86.614,63.97 ; 82.677,88.011 86.106,88.011 ; 93.421,88.011 98.044,88.011 ; 97.155,63.932 100.584,63.932 ; 99.187,38.392 103.251,38.392
  other v1: 74.447,33.096 76.683,33.096 78.816,33.096 101.092,33.147 103.327,33.147 105.461,33.147 55.702,33.807 57.937,33.807 53.823,33.858 82.347,33.858 84.582,33.858 80.467,33.909 74.447,34.823 76.683,34.849 101.092,34.874 78.892,34.9 103.327,34.9 105.537,34.95 53.772,35.484 57.963,35.484 80.416,35.535 84.607,35.535 55.702,35.56 67.259,35.585 63.094,35.611 82.347,35.611 62.408,35.636 68.047,35.636 93.904,35.636 89.738,35.662 89.052,35.687 94.691,35.687 62.433,36.246 63.094,36.246 72.339,36.271 68.047,36.297 73.025,36.297 89.078,36.297 89.738,36.297 98.984,36.322 94.691,36.347 99.67,36.347 73.05,36.957 99.695,37.008 60.198,40.538 86.843,40.589 60.198,41.148 59.461,41.173 86.843,41.199 65.43,41.224 86.106,41.224 70.383,41.25 92.075,41.275 97.028,41.3 64.719,41.808 65.38,41.808 74.422,41.834 76.911,41.834 70.333,41.859 91.364,41.859 92.024,41.859 69.647,41.885 78.842,41.885 101.067,41.885 103.556,41.885 96.977,41.91 96.291,41.935 105.486,41.935 55.855,42.57 82.499,42.621 53.848,42.647 58.115,42.647 80.493,42.697 84.76,42.697 76.911,43.586 74.422,43.612 103.556,43.637 78.867,43.663 101.067,43.663 105.512,43.713 53.721,44.348 55.778,44.348 58.115,44.374 80.366,44.399 82.423,44.399 84.76,44.425 53.696,58.623 55.931,58.623 71.755,58.623 74.143,58.674 80.34,58.674 82.575,58.674 98.4,58.674 58.064,58.699 76.149,58.699 100.787,58.725 84.709,58.75 102.794,58.75 71.755,60.325 98.4,60.376 55.855,60.401 74.219,60.401 53.67,60.427 76.2,60.427 58.191,60.452 82.499,60.452 100.863,60.452 80.315,60.477 102.845,60.477 84.836,60.503 64.948,60.681 91.592,60.731 66.142,60.808 92.786,60.858 70.231,61.519 96.876,61.57 59.741,61.595 71.272,61.595 86.385,61.646 97.917,61.646 60.706,61.671 66.142,61.697 87.351,61.722 92.786,61.747 60.731,62.56 71.272,62.56 87.376,62.611 97.917,62.611 63.525,66.675 68.326,66.7 90.17,66.726 94.971,66.751 73.863,67.361 53.797,67.412 58.09,67.412 100.508,67.412 55.829,67.437 71.958,67.437 63.475,67.462 80.442,67.462 84.734,67.462 76.149,67.488 82.474,67.488 98.603,67.488 68.326,67.513 90.119,67.513 102.794,67.539 94.971,67.564 67.335,67.615 62.433,67.666 93.98,67.666 89.078,67.716 55.804,69.139 53.569,69.164 58.115,69.164 71.882,69.164 82.448,69.19 76.175,69.215 80.213,69.215 84.76,69.215 98.527,69.215 73.863,69.24 102.819,69.266 100.508,69.291 56.109,82.575 73.635,82.601 53.721,82.626 58.242,82.626 71.552,82.626 82.753,82.626 100.279,82.652 69.367,82.677 80.366,82.677 84.887,82.677 98.196,82.677 96.012,82.728 53.746,83.464 58.166,83.49 80.391,83.515 69.367,83.541 84.811,83.541 71.526,83.579 73.66,83.566 96.012,83.591 98.171,83.629 100.305,83.617 58.217,84.404 53.797,84.455 84.861,84.455 56.032,84.48 69.342,84.48 71.425,84.506 80.442,84.506 73.711,84.531 82.677,84.531 95.987,84.531 98.069,84.557 100.355,84.582 64.592,84.836 65.354,84.861 91.237,84.887 91.999,84.912 59.309,85.649 65.354,85.649 60.096,85.674 85.954,85.7 91.999,85.7 86.741,85.725 60.122,86.462 86.766,86.512 68.097,90.068 94.742,90.119 68.097,90.729 67.386,90.754 94.742,90.78 94.031,90.805 63.119,90.856 89.764,90.907 71.323,91.389 73.66,91.415 97.968,91.44 69.164,91.465 100.305,91.465 95.809,91.516 56.032,91.618 58.166,91.643 62.23,91.669 82.677,91.669 53.823,91.694 84.811,91.694 63.094,91.719 88.875,91.719 80.467,91.745 89.738,91.77 73.685,92.329 58.141,92.38 69.19,92.38 100.33,92.38 53.823,92.405 71.323,92.405 84.785,92.431 95.834,92.431 80.467,92.456 97.968,92.456 56.032,93.142 58.115,93.142 53.823,93.167 82.677,93.193 84.76,93.193 80.467,93.218 69.215,93.269 71.374,93.294 73.762,93.32 95.86,93.32 98.019,93.345 100.406,93.37

## Keep-outs
Keep-Out Layer:
  the board outline again, w0.254

## Other copper
Top Layer:
  rectangle: 88.011,87.376 90.043,89.916
  rectangle: 90.424,86.614 92.329,89.154
  rectangle: 88.519,63.424 90.424,65.837
  rectangle: 90.932,62.535 92.837,65.075
  rectangle: 93.345,63.424 95.25,65.837
  rectangle: 88.265,37.211 90.17,39.624
  rectangle: 93.091,37.211 95.123,39.751
  rectangle: 90.678,37.973 92.583,40.386
  rectangle: 95.631,37.973 97.409,40.386
  rectangle: 85.598,85.395 87.046,86.868
  rectangle: 88.544,90.399 90.018,92.126
  rectangle: 90.907,84.607 92.278,85.979
  rectangle: 93.574,89.789 94.996,91.135
  rectangle: 86.106,61.341 87.681,62.89
  rectangle: 91.237,60.427 93.066,62.027
  rectangle: 96.596,61.316 98.222,62.89
  rectangle: 88.773,66.472 90.449,67.996
  rectangle: 93.701,66.446 95.275,67.945
  rectangle: 85.852,40.208 87.122,41.605
  rectangle: 91.059,40.97 92.354,42.24
  rectangle: 96.012,40.996 97.307,42.342
  rectangle: 98.679,35.992 99.974,37.262
  rectangle: 93.599,35.331 94.971,36.627
  rectangle: 88.748,35.306 90.094,36.601
  rectangle: 61.366,87.325 63.398,89.865
  rectangle: 63.779,86.563 65.684,89.103
  rectangle: 61.874,63.373 63.779,65.786
  rectangle: 64.287,62.484 66.192,65.024
  rectangle: 66.7,63.373 68.605,65.786
  rectangle: 61.62,37.16 63.525,39.573
  rectangle: 66.446,37.16 68.478,39.7
  rectangle: 64.033,37.922 65.938,40.335
  rectangle: 68.986,37.922 70.764,40.335
  rectangle: 58.953,85.344 60.401,86.817
  rectangle: 61.9,90.348 63.373,92.075
  rectangle: 64.262,84.557 65.634,85.928
  rectangle: 66.929,89.738 68.351,91.084
  rectangle: 59.461,61.29 61.036,62.84
  rectangle: 64.592,60.376 66.421,61.976
  rectangle: 69.952,61.265 71.577,62.84
  rectangle: 62.128,66.421 63.805,67.945
  rectangle: 67.056,66.396 68.631,67.894
  rectangle: 59.207,40.157 60.477,41.554
  rectangle: 64.414,40.919 65.71,42.189
  rectangle: 69.367,40.945 70.663,42.291
  rectangle: 72.034,35.941 73.33,37.211
  rectangle: 66.954,35.281 68.326,36.576
  rectangle: 62.103,35.255 63.449,36.551
  rectangle net NetC1_2: 34.62,87.351 36.652,89.891
  rectangle net NetC2_2: 37.033,86.589 38.938,89.129
  rectangle net NetC9_1: 35.128,63.398 37.033,65.811
  rectangle net NetC11_2: 37.541,62.509 39.446,65.049
  rectangle net NetC13_1: 39.954,63.398 41.859,65.811
  rectangle net NetC24_2: 34.874,37.186 36.779,39.599
  rectangle net NetC20_2: 39.7,37.186 41.732,39.726
  rectangle net NetC22_1: 37.287,37.948 39.192,40.361
  rectangle net NetC18_1: 42.24,37.948 44.018,40.361
  rectangle net GND: 32.207,85.369 33.655,86.843
  rectangle net GND: 35.154,90.373 36.627,92.1
  rectangle net GND: 37.516,84.582 38.887,85.954
  rectangle net GND: 40.183,89.764 41.605,91.11
  rectangle net GND: 32.715,61.316 34.29,62.865
  rectangle net GND: 37.846,60.401 39.675,62.001
  rectangle net GND: 43.205,61.29 44.831,62.865
  rectangle net GND: 35.382,66.446 37.059,67.97
  rectangle net GND: 40.31,66.421 41.885,67.92
  rectangle net GND: 32.461,40.183 33.731,41.58
  rectangle net GND: 37.668,40.945 38.964,42.215
  rectangle net GND: 42.621,40.97 43.917,42.316
  rectangle net GND: 45.288,35.966 46.584,37.236
  rectangle net GND: 40.208,35.306 41.58,36.601
  rectangle net GND: 35.357,35.281 36.703,36.576
  rectangle net GND: 8.738,35.331 10.084,36.627
  rectangle net GND: 13.589,35.357 14.961,36.652
  rectangle net GND: 18.669,36.017 19.964,37.287
  rectangle net GND: 16.002,41.021 17.297,42.367
  rectangle net GND: 11.049,40.996 12.344,42.266
  rectangle net GND: 5.842,40.234 7.112,41.631
  rectangle net GND: 13.691,66.472 15.265,67.97
  rectangle net GND: 8.763,66.497 10.439,68.021
  rectangle net GND: 16.586,61.341 18.212,62.916
  rectangle net GND: 11.227,60.452 13.056,62.052
  rectangle net GND: 6.096,61.366 7.671,62.916
  rectangle net GND: 13.564,89.814 14.986,91.161
  rectangle net GND: 10.897,84.633 12.268,86.004
  rectangle net GND: 8.534,90.424 10.008,92.151
  rectangle net GND: 5.588,85.42 7.036,86.893
  rectangle net NetC18_1: 15.621,37.998 17.399,40.411
  rectangle net NetC22_1: 10.668,37.998 12.573,40.411
  rectangle net NetC20_2: 13.081,37.236 15.113,39.776
  rectangle net NetC24_2: 8.255,37.236 10.16,39.649
  rectangle net NetC13_1: 13.335,63.449 15.24,65.862
  rectangle net NetC11_2: 10.922,62.56 12.827,65.1
  rectangle net NetC9_1: 8.509,63.449 10.414,65.862
  rectangle net NetC2_2: 10.414,86.639 12.319,89.179
  rectangle net NetC1_2: 8.001,87.401 10.033,89.941
Bottom Layer:
  rectangle: 80.137,76.251 100.559,99.974
  rectangle: 79.985,52.197 103.378,75.336
  rectangle: 80.086,26.594 105.816,50.8
  rectangle: 53.365,76.2 73.914,99.924
  rectangle: 53.34,52.146 76.733,75.286
  rectangle: 53.442,26.543 79.172,50.749
  rectangle net GND: 26.619,76.225 47.269,99.949
  rectangle net GND: 26.594,52.172 49.987,75.311
  rectangle net GND: 26.695,26.568 52.426,50.775
  rectangle net GND: 0.076,26.619 25.806,50.825
  rectangle net GND: -0.025,52.222 23.368,75.362
  rectangle net GND: 0,76.276 20.574,100

## Silkscreen, mask and mechanical layers (free items; w line width, h text height)
Top Solder:
  rectangle: 58.547,31.852 74.447,45.441
  rectangle: 85.192,32.029 100.559,45.136
  rectangle: 85.192,57.76 98.222,70.231
  rectangle: 58.471,57.658 71.628,69.723
  rectangle: 31.598,58.191 44.831,70.307
  rectangle: 31.648,32.487 47.219,44.856
  rectangle: 5.232,32.715 20.726,44.831
  rectangle: 5.131,58.268 18.186,69.698
  rectangle: 85.344,82.22 95.555,93.751
  rectangle: 58.699,82.169 68.91,93.701
  rectangle: 31.953,82.194 42.164,93.726
  rectangle: 5.334,82.245 15.545,93.777